# Altium PCB PCB1.PcbDoc
Units mil, origin at the board's own origin, x right, y up, seen from the top; angles counter-clockwise.
Board outline 6000 x 4000 mil, 2 copper layers (Top Layer, Bottom Layer); 13 components, 8 nets, 60 pads, 0 vias.
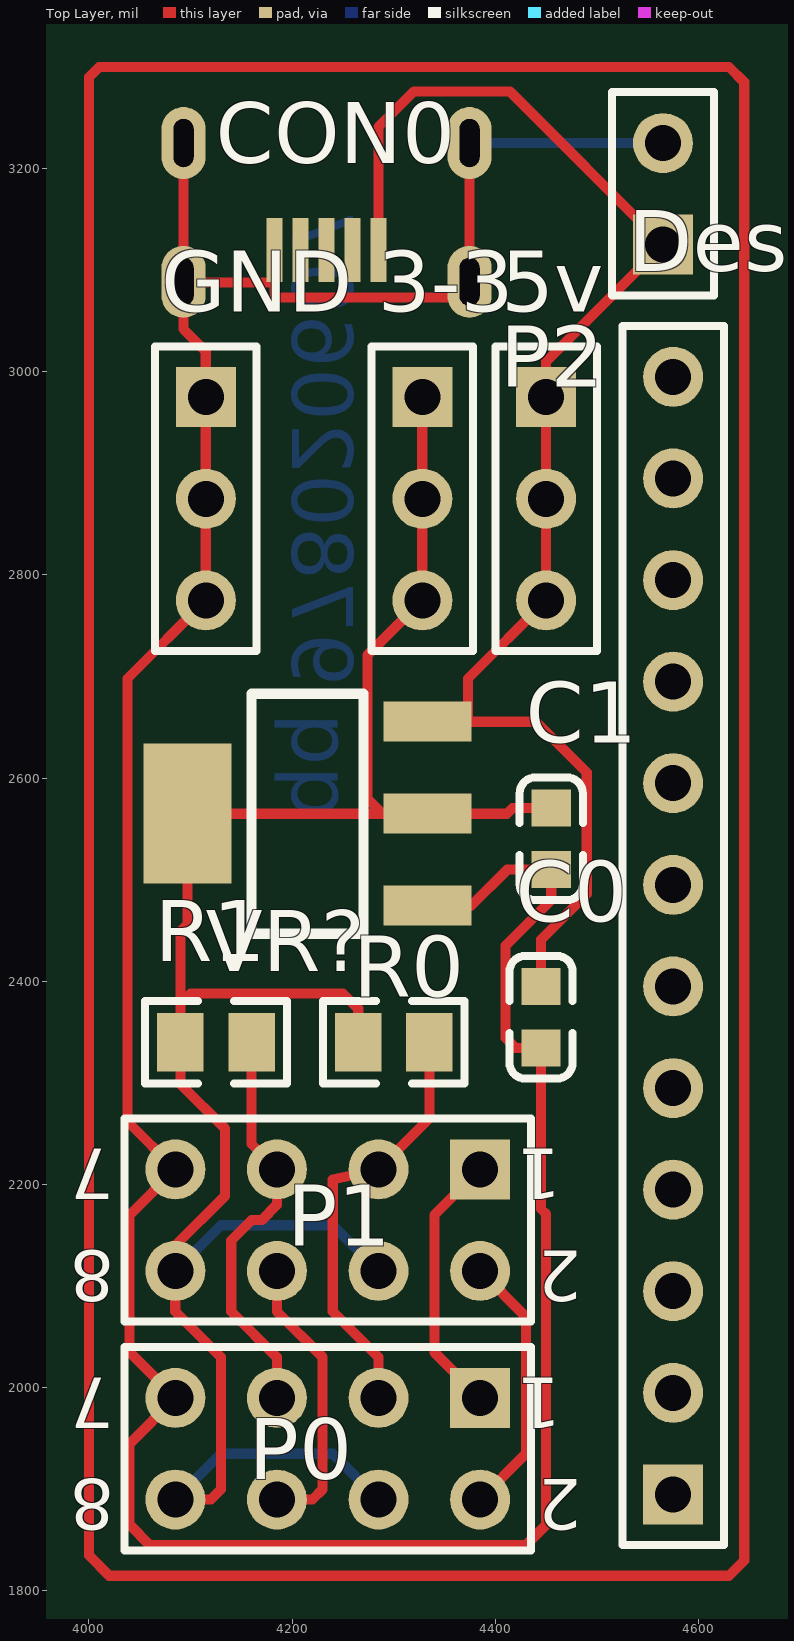
[diagram p0: Top Layer view]
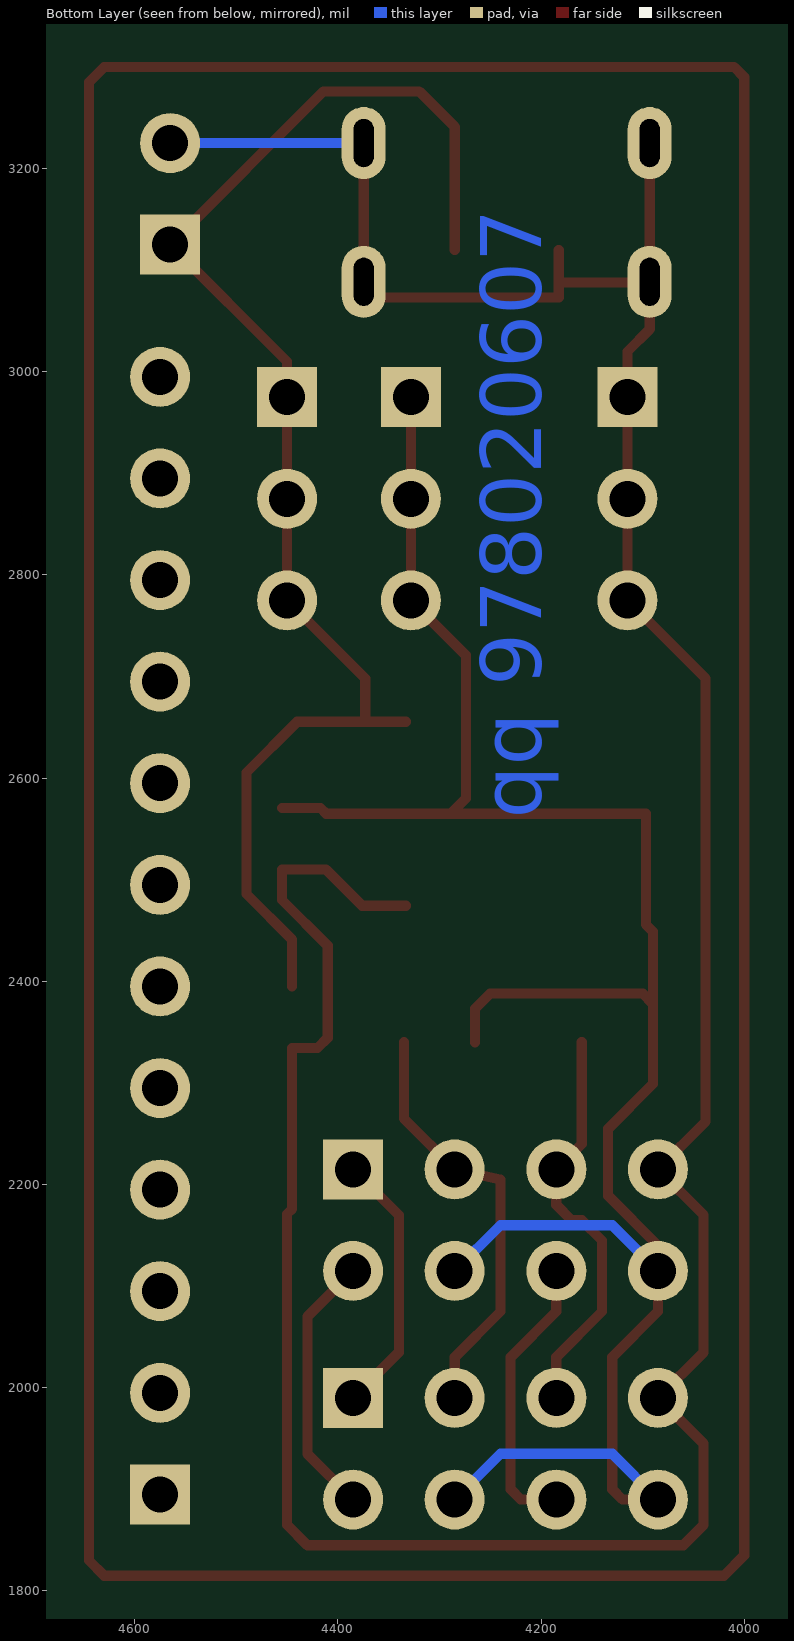
[diagram p1: Bottom Layer view, seen from below]

## Layer stack, top to bottom
Top Solder: solder mask 0.4, Solder Resist, Dk 3.5
Top Layer: signal copper 1.4
Dielectric 1: dielectric 12.6, FR-4, Dk 4.8
Bottom Layer: signal copper 1.4
Bottom Solder: solder mask 0.4, Solder Resist, Dk 3.5

## Board outline
1000,1000 7000,1000 7000,5000 1000,5000

## Design rules (kind name [scope] priority, off if disabled: settings)
Clearance [All] p1: gap=10 ignorepadtopadclearanceinfootprint=FALSE except(0: Arc-Hole Track-Hole SMDPad-Hole THPad-Hole Via-Hole Fill-Hole Poly-Hole Region-Hole Text-Hole)
PolygonConnect [All] p1: connectstyle=Relief reliefconductorwidth=10 reliefentries=4 polygonreliefangle="90 Angle" airgapwidth=10
RoomDefinition Sheet1 [InComponentClass('Sheet1')] p1: confinementstyle=ConfineIn formatcopy=TRUE lockcomponents=FALSE outline 4640.43,1824.88 4640.43,3290 4015.43,3290 4015.43,1824.88
RoutingVias [All] p1: holewidth=28 width=50 viastyle="Through Hole" minholewidth=28 minwidth=50 maxholewidth=28 maxwidth=50
SolderMaskExpansion [All] p1: expansion=4
Width [All] p1: maxlimit=10 minlimit=10 preferedwidth=10
30 further rules are at their usual default settings.

## Classes and differential pairs
component class Sheet1: 3-3 5v C0 C1 CON0 GND P0 P1 P2 R0 R1 VR?

## Components (designator, comment, footprint, x,y, rotation, side; value= is the part's Value field where it differs from the comment)
3-3 "Header 3" HDR1X3 4328.11,2975 r270 top
5v "Header 3" HDR1X3 4450,2975 r270 top
C0 "10uF (106) 10% 10V" LC-0603_C 4445,2364.68 r90 top
C1 "10uF (106) 10% 10V" LC-0603_C 4455,2540.31 r90 top
CON0 "USB_Connector" MicroUSB 4233.82,3088.5 r270 top
Designator4 "Comment" HDR1X12 4575,1895 r90 top
GND "Header 3" HDR1X3 4115,2975 r270 top
P0 "Header 4X2" HDR2X4 4385,1990 r180 top
P1 "Header 4X2" HDR2X4 4385,2215 r180 top
P2 "Header 2" HDR1X2 4565,3125.12 r90 top
R0 "10KΩ (1002) ±1%" LC-0805_R 4300.04,2340 r180 top
R1 "10KΩ (1002) ±1%" LC-0805_R 4125,2340 r180 top
VR? "AMS1117-3.3" LC-SOT-223 4215,2565 r0 top

## Footprints (in the part's own frame and the unit in brackets; to place one, negate y for a bottom-side part, rotate by r counter-clockwise, add the part's x,y. Pads: shape width x height; smd on the part's side, far side on the other; paste and mask are expansions set on the pad)
HDR1X2 [mm] "Connector; Header; 2 Position"
  rect 1.5x1.5 hole 0.9: 1(0,0)
  round 1.5 hole 0.9: 2(2.54,0)
  silkscreen extent -1.27,-1.27 3.81,1.27
HDR1X3 [mm] "Connector; Header; 3 Position"
  rect 1.5x1.5 hole 0.9: 1(0,0)
  round 1.5 hole 0.9: 2(2.54,0) 3(5.08,0)
  silkscreen extent -1.27,-1.27 6.35,1.27
HDR1X12 [mm] "Connector; Header; 12 Position"
  rect 1.5x1.5 hole 0.9: 1(0,0)
  round 1.5 hole 0.9: 2(2.54,0) 3(5.08,0) 4(7.62,0) 5(10.16,0) 6(12.7,0) 7(15.24,0) 8(17.78,0) 9(20.32,0) 10(22.86,0) 11(25.4,0) 12(27.94,0)
  silkscreen extent -1.27,-1.27 29.21,1.27
HDR2X4 [mm] "Connector; Header; 4x2 Position"
  rect 1.5x1.5 hole 0.9: 1(0,0)
  round 1.5 hole 0.9: 2(0,2.54) 3(2.54,0) 4(2.54,2.54) 5(5.08,0) 6(5.08,2.54) 7(7.62,0) 8(7.62,2.54)
  silkscreen extent -1.27,-1.27 8.89,3.81
LC-0603_C [mm]
  rect 0.93x0.98 smd: 1(-0.77,0) 2(0.77,0)
  silkscreen extent -1.53,-0.79 1.54,0.79, body extent -0.8,-0.4 0.8,0.4, height 0.3
LC-0805_R [mm]
  rect 1.16x1.47 smd: 1(-0.89,0) 2(0.89,0)
  silkscreen extent -1.77,-1.03 1.77,1.03, body extent -1,-0.62 1,0.63, height 0.49
LC-SOT-223 [mm]
  rect 2.2x1 smd: 1(3,-2.3) 2(3,0) 3(3,2.3)
  rect 2.2x3.5 smd: 2(-3,0)
  silkscreen extent -1.4,-3 1.4,3, body extent -3.49,-3.24 3.49,3.24, height 1.64
MicroUSB [mm]
  rect 1.6x0.4 smd mask+0.05: 1(-0.8,1.3) 2(-0.8,0.65) 3(-0.8,0) 4(-0.8,-0.65) 5(-0.8,-1.3)
  oval 1.8x1.1 hole 0.5 slot 1.2 at 0 deg: GND(-3.47,3.575) GND(-3.47,-3.575) GND(0,3.575) GND(0,-3.575)

## Part data
3-3 5v GND: "Header, 3-Pin", LatestRevisionDate=17-Jul-2002, LatestRevisionNote="Re-released for DXP Platform.", Publisher="Altium Limited"
C0 C1: library part "0603 10uF (106) 10% 10V", "贴片电容", Package=0603, SuppliersPartNumber=C19702, ComponentLink1Description=供?, ComponentLink1URL=http://www.szlcsc.com/product/details_20411.html, Supplier=LC
P0 P1: "Header, 4-Pin, Dual row", LatestRevisionDate=17-Jul-2002, LatestRevisionNote="Re-released for DXP Platform.", Publisher="Altium Limited"
P2: "Header, 2-Pin", LatestRevisionDate=17-Jul-2002, LatestRevisionNote="Re-released for DXP Platform.", Publisher="Altium Limited"
R0 R1: library part "0805 10KΩ (1002) 1%", "贴片电阻", Package=0805, SuppliersPartNumber=C17414, ComponentLink1Description=供?, ComponentLink1URL=http://www.szlcsc.com/product/details_18102.html, Supplier=LC
VR?: library part "SOT-223 AMS1117-3.3", "低压差线性稳压(LDO)", Package=SOT-223, SuppliersPartNumber=C6186, ComponentLink1Description=供?, ComponentLink1URL=http://www.szlcsc.com/product/details_6652.html, Supplier=LC

## Nets (pads, with @x,y where several pads share a name; then routed paths per layer and width w, separated by ;. In a path a pad name is that pad's centre, name@x,y a point inside that pad or via, vN(x,y) a via of type N, cw(c..) or ccw(c..) an arc to the next point about the centre after c; other vN are vias at no path point)
Net3-3_1: 3-3.1 3-3.2 3-3.3 C1.2 P0.4 P0.8 P1.4 P1.8 R0.2 R1.2 VR?.2 | length 2266.2
  Top Layer w10: P0.8 4120,1890 4130,1900 4130,2030 4085,2075 P1.8 4085,2140 4134,2189 4134,2255 4089.96,2299.04 R1.2 4089.96,2377.92 ; R0.2 4265,2372.96 4250,2387.96 4100,2387.96 4089.96,2377.92 ; 3-3.1 3-3.2 3-3.3 4274,2720.89 4274,2580 4289,2565 ; C1.2 4417.05,2570.63 4411.42,2565 4333.11,2565 4289,2565 ; 4089.96,2377.92 4089.96,2449 4096.89,2455.93 4096.89,2565 4289,2565
  Bottom Layer w10: P0.8 4130,1935 4240,1935 P0.4 ; P1.8 4130,2160 4240,2160 P1.4
Net5v_1: 5v.1 5v.2 5v.3 C0.2 CON0.1 P2.1 VR?.3 | length 1433.9
  Top Layer w10: CON0.1 4285,3241 4320,3276 4414.12,3276 P2.1 4450,3010.12 5v.1 5v.2 5v.3 4373,2698 VR?.3@4373,2655.55 ; VR?.3 VR?.3@4373,2655.55 ; C0.2 4445,2441 4490,2486 4490,2605.55 4440,2655.55 VR?.3@4373,2655.55
NetC0_1: C0.1 C1.1 CON0.5 CON0.GND GND.1 GND.2 GND.3 P0.7 P1.7 P2.2 VR?.1 | length 3405.6
  Top Layer w10: CON0.GND@4093.07,3225.12 4093.07,3088.5 CON0.GND@4093.07,3088 ; CON0.5 4182.64,3088 ; VR?.1 4376,2474.45 4411.55,2510 C1.1 4455,2480 4410,2435 4410,2344.37 4420,2334.37 C0.1 4445,2176 4450,2171 4450,1865 4430,1845 4060,1845 4040,1865 4040,1945 P0.7 4040,2035 4040,2170 P1.7 4038,2262 4038,2698 GND.3 GND.2 GND.1 4115,3020 4093.07,3041.93 CON0.GND@4093.07,3088 ; CON0.GND@4374.57,3225.12 4374.57,3088.5 4374.57,3073 4182.64,3073 4182.64,3088 ; CON0.GND@4093.07,3088 4182.64,3088
  Bottom Layer w10: CON0.GND@4374.57,3225.12 P2.2
NetP0_1: P0.1 P1.1 | length 262.3
  Top Layer w10: P0.1 4340,2035 4340,2170 P1.1
NetP0_2: P0.2 P1.2 | length 262.3
  Top Layer w10: P0.2 4430,1935 4430,2070 P1.2
NetP0_3: P0.3 P1.3 R0.1 | length 425.5
  Top Layer w10: P0.3 4285,2030 4240,2075 4240,2205 P1.3 4335.08,2265.08 R0.1
NetP0_5: P0.5 P1.5 R1.1 | length 403.5
  Top Layer w10: R1.1 4160.04,2239.96 P1.5 4185,2180 4170,2165 4160,2165 4140,2145 4140,2075 4185,2030 P0.5
NetP0_6: P0.6 P1.6 | length 282.8
  Top Layer w10: P0.6 4220,1890 4230,1900 4230,2030 4185,2075 P1.6
pads on no net: CON0.2 CON0.3 CON0.4 Designator4.1 Designator4.2 Designator4.3 Designator4.4 Designator4.5 Designator4.6 Designator4.7 Designator4.8 Designator4.9 Designator4.10 Designator4.11 Designator4.12
copper on no net: | length 4224.9
  Top Layer w10: 4000,1835 4000,3290 4010,3300 4630,3300 4645,3285 4645,1830 4630,1815 4020,1815 4000,1835

## Other copper
Bottom Layer:
  text "qq 978020607" at 4200,2560 h60 r270

## Text inside footprints (layer, text, board x,y; h text height)
P0: Top Overlay "8" at 4025,1910 h50 r180; Top Overlay "7" at 4025,2010 h50 r180; Top Overlay "1" at 4465,2010 h50 r180; Top Overlay "2" at 4485,1910 h50 r180
P1: Top Overlay "8" at 4025,2135 h50 r180; Top Overlay "7" at 4025,2235 h50 r180; Top Overlay "1" at 4465,2235 h50 r180; Top Overlay "2" at 4485,2135 h50 r180